# Altium PCB STM32F302VC_EVM.PcbDoc (part 10 of 19)
Units mil, origin at the board's own origin, x right, y up, seen from the top; angles counter-clockwise.
Board outline 3937.01 x 3937.01 mil, 2 copper layers (Top Layer, Bottom Layer); 117 components, 166 nets, 602 pads, 373 vias.
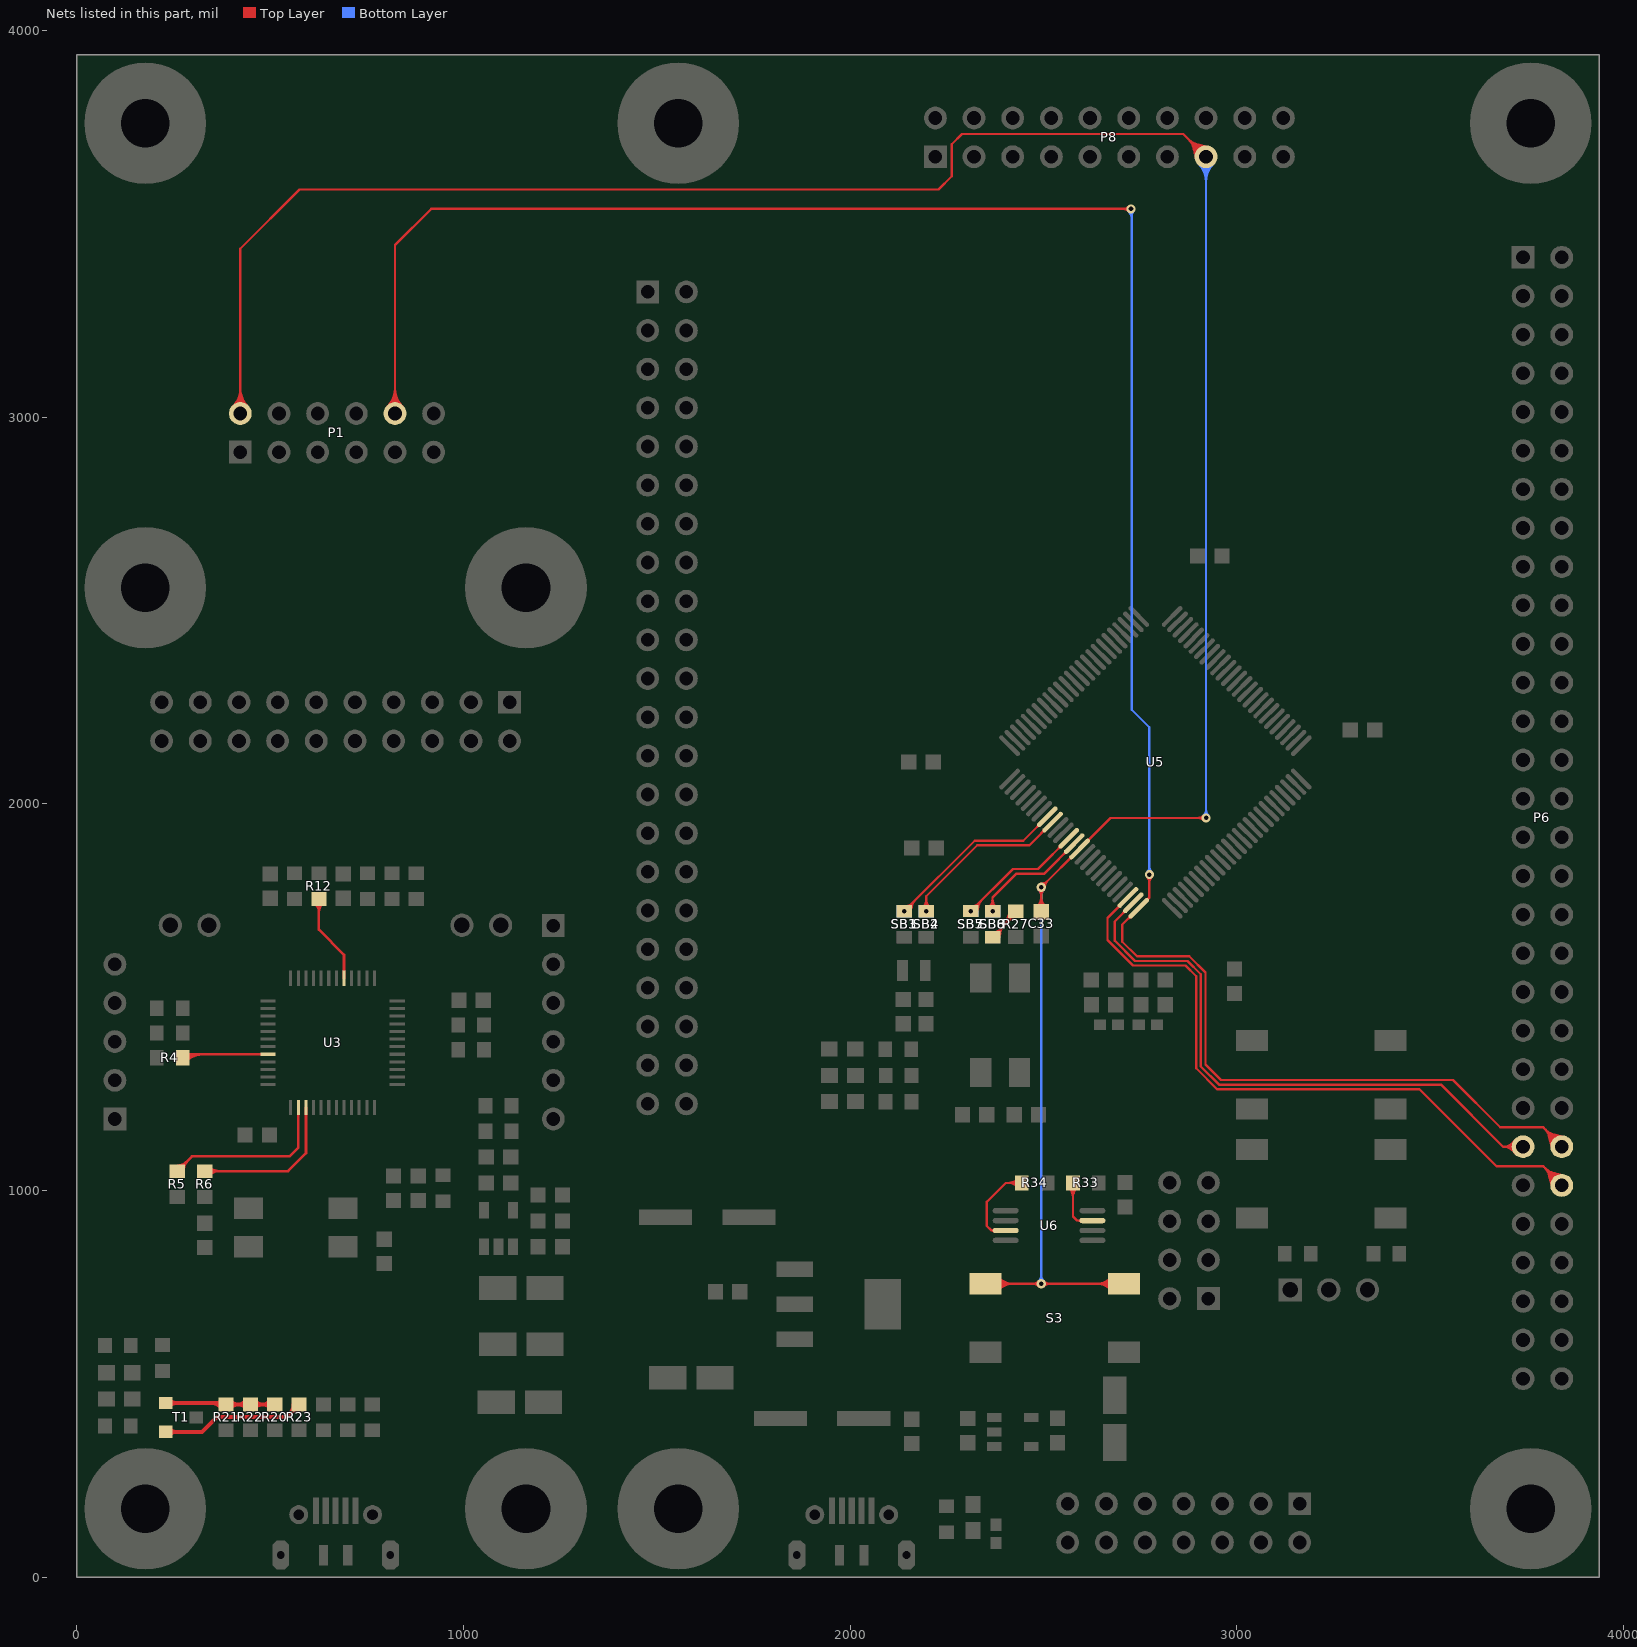
[diagram p10: the nets of this part, all layers, seen from the top]

## Via types
v1: diameter 23.62, hole 11.81, Top Layer to Bottom Layer, tented both sides, 372 vias
v2: diameter 50, hole 28, Top Layer to Bottom Layer, tented both sides, 1 vias

## Nets (pads, with @x,y where several pads share a name; then routed paths per layer and width w, separated by ;. In a path a pad name is that pad's centre, name@x,y a point inside that pad or via, vN(x,y) a via of type N, cw(c..) or ccw(c..) an arc to the next point about the centre after c; other vN are vias at no path point) (continued)
NetR4_2: R4.2 U3.44 | length 563.8
  Top Layer w7: R4.2@273.62,1343.5 282.48,1352.36 U3.44@494.09,1352.36 ; R4.2@273.78,1345.32 cw(c290.78,1328.32) R4.2@290.78,1352.36 ; R4.2@273.78,1345.32 cw(c290.78,1328.32) R4.2@290.78,1352.36 ; R4.2@273.78,1345.32 cw(c290.78,1328.32) R4.2@290.78,1352.36 ; R4.2@278.72,1340.37 cw(c307.68,1311.42) 307.68,1352.36 ; R4.2@278.72,1340.37 cw(c307.68,1311.42) 307.68,1352.36 ; R4.2@278.72,1340.37 cw(c307.68,1311.42) 307.68,1352.36 ; R4.2@283.67,1335.42 cw(c324.58,1294.52) 324.58,1352.36 ; R4.2@283.67,1335.42 cw(c324.58,1294.52) 324.58,1352.36 ; R4.2@283.67,1335.42 cw(c324.58,1294.52) 324.58,1352.36 ; R4.2@283.67,1355.52 ccw(c291.31,1363.16) R4.2@291.31,1352.36 ; R4.2@283.67,1355.52 ccw(c291.31,1363.16) R4.2@291.31,1352.36 ; R4.2@283.67,1355.52 ccw(c291.31,1363.16) R4.2@291.31,1352.36 ; R4.2@287.35,1341.79 cw(c297.52,1339.07) 292.26,1348.18 ; R4.2@287.35,1341.79 cw(c297.52,1339.07) 292.26,1348.18 ; R4.2@287.35,1341.79 cw(c297.52,1339.07) 292.26,1348.18
NetR5_2: R5.2 U3.2 | length 735.8
  Top Layer w7: R5.2@259.84,1050.2 298.1,1088.46 550.07,1088.46 572.83,1111.22 U3.2@572.83,1214.57 ; R5.2@261.81,1064.41 ccw(c261.81,1093.98) 282.72,1073.07 ; R5.2@261.81,1064.41 ccw(c261.81,1093.98) 282.72,1073.07 ; R5.2@261.81,1064.41 ccw(c261.81,1093.98) 282.72,1073.07 ; R5.2@262.03,1050.16 cw(c284.85,1046.68) 278.87,1068.99 ; R5.2@262.03,1050.16 cw(c284.85,1046.68) 278.87,1068.99 ; R5.2@262.03,1050.16 cw(c284.85,1046.68) 278.87,1068.99 ; R5.2@269.03,1050.2 cw(c291.2,1050.2) R5.2@275.52,1065.88 ; R5.2@269.03,1050.2 cw(c291.2,1050.2) R5.2@275.52,1065.88 ; R5.2@269.03,1050.2 cw(c291.2,1050.2) R5.2@275.52,1065.88 ; R5.2@276.03,1050.2 cw(c315.1,1050.2) 287.47,1077.83 ; R5.2@276.03,1050.2 cw(c315.1,1050.2) 287.47,1077.83 ; R5.2@276.03,1050.2 cw(c315.1,1050.2) 287.47,1077.83
NetR6_2: R6.2 U3.3 | length 560.7
  Top Layer w7: R6.2@330.71,1050.2 546.1,1050.2 592.52,1096.62 U3.3@592.52,1214.57 ; R6.2@342.73,1040.14 cw(c367,1015.88) 367,1050.2 ; R6.2@342.73,1040.14 cw(c367,1015.88) 367,1050.2 ; R6.2@342.73,1040.14 cw(c367,1015.88) 367,1050.2 ; R6.2@342.73,1060.25 ccw(c367,1084.52) 367,1050.2 ; R6.2@342.73,1060.25 ccw(c367,1084.52) 367,1050.2 ; R6.2@342.73,1060.25 ccw(c367,1084.52) 367,1050.2
NetR12_1: R12.1 U3.29 | length 393.4
  Top Layer w7: R12.1@625.98,1753.94 625.98,1674.58 690.94,1609.62 U3.29@690.94,1549.21 ; R12.1@615.93,1743.88 cw(c591.66,1719.62) 625.98,1719.62 ; R12.1@615.93,1743.88 cw(c591.66,1719.62) 625.98,1719.62 ; R12.1@615.93,1743.88 cw(c591.66,1719.62) 625.98,1719.62 ; 625.98,1719.62 cw(c660.31,1719.62) R12.1@636.04,1743.88 ; 625.98,1719.62 cw(c660.31,1719.62) R12.1@636.04,1743.88 ; 625.98,1719.62 cw(c660.31,1719.62) R12.1@636.04,1743.88
NetR20_1: R20.1 R21.1 R22.2 T1.1 | length 1128.8
  Top Layer w10: T1.1@230.31,450.79 381.89,450.79 R21.1@385.83,446.85 R22.2@448.82,446.85 R20.1@511.81,446.85 ; T1.1@239.88,443.19 cw(c258.23,424.84) 258.23,450.79 ; T1.1@239.88,443.19 cw(c258.23,424.84) 258.23,450.79 ; T1.1@239.88,443.19 cw(c258.23,424.84) 258.23,450.79 ; T1.1@239.88,458.39 ccw(c258.23,476.74) 258.23,450.79 ; T1.1@239.88,458.39 ccw(c258.23,476.74) 258.23,450.79 ; T1.1@239.88,458.39 ccw(c258.23,476.74) 258.23,450.79 ; 343.65,450.79 cw(c343.65,406.64) R21.1@374.87,437.86 ; 343.65,450.79 cw(c343.65,406.64) R21.1@374.87,437.86 ; 343.65,450.79 cw(c343.65,406.64) R21.1@374.87,437.86 ; 362.66,450.79 ccw(c362.66,468.05) R21.1@374.87,455.84 ; 362.66,450.79 ccw(c362.66,468.05) R21.1@374.87,455.84 ; 362.66,450.79 ccw(c362.66,468.05) R21.1@374.87,455.84 ; R21.1@396.79,437.86 cw(c418.5,416.15) 418.5,446.85 ; R21.1@396.79,437.86 cw(c418.5,416.15) 418.5,446.85 ; R21.1@396.79,437.86 cw(c418.5,416.15) 418.5,446.85 ; R21.1@396.79,455.84 ccw(c418.5,477.55) 418.5,446.85 ; R21.1@396.79,455.84 ccw(c418.5,477.55) 418.5,446.85 ; R21.1@396.79,455.84 ccw(c418.5,477.55) 418.5,446.85 ; 416.15,446.85 cw(c416.15,416.15) R22.2@437.86,437.86 ; 416.15,446.85 ccw(c416.15,477.55) R22.2@437.86,455.84 ; 416.15,446.85 ccw(c416.15,477.55) R22.2@437.86,455.84 ; 416.15,446.85 cw(c416.15,416.15) R22.2@437.86,437.86 ; 416.15,446.85 ccw(c416.15,477.55) R22.2@437.86,455.84 ; 416.15,446.85 cw(c416.15,416.15) R22.2@437.86,437.86 ; R22.2@459.78,437.86 cw(c481.49,416.15) 481.49,446.85 ; R22.2@459.78,437.86 cw(c481.49,416.15) 481.49,446.85 ; R22.2@459.78,437.86 cw(c481.49,416.15) 481.49,446.85 ; R22.2@459.78,455.84 ccw(c481.49,477.55) 481.49,446.85 ; R22.2@459.78,455.84 ccw(c481.49,477.55) 481.49,446.85 ; R22.2@459.78,455.84 ccw(c481.49,477.55) 481.49,446.85 ; 479.14,446.85 cw(c479.14,416.15) R20.1@500.85,437.86 ; 479.14,446.85 ccw(c479.14,477.55) R20.1@500.85,455.84 ; 479.14,446.85 ccw(c479.14,477.55) R20.1@500.85,455.84 ; 479.14,446.85 cw(c479.14,416.15) R20.1@500.85,437.86 ; 479.14,446.85 ccw(c479.14,477.55) R20.1@500.85,455.84 ; 479.14,446.85 cw(c479.14,416.15) R20.1@500.85,437.86
NetR23_2: R23.2 T1.2 | length 725.9
  Top Layer w10: T1.2@230.31,375.98 323.82,375.98 362.2,414.37 542.32,414.37 R23.2@574.8,446.85 ; T1.2@239.88,368.38 cw(c258.23,350.04) 258.23,375.98 ; T1.2@239.88,368.38 cw(c258.23,350.04) 258.23,375.98 ; T1.2@239.88,368.38 cw(c258.23,350.04) 258.23,375.98 ; T1.2@239.88,383.58 ccw(c258.23,401.93) 258.23,375.98 ; T1.2@239.88,383.58 ccw(c258.23,401.93) 258.23,375.98 ; T1.2@239.88,383.58 ccw(c258.23,401.93) 258.23,375.98 ; 549.73,421.78 ccw(c524.67,446.85) R23.2@560.12,446.85 ; 549.73,421.78 ccw(c524.67,446.85) R23.2@560.12,446.85 ; 549.73,421.78 ccw(c524.67,446.85) R23.2@560.12,446.85 ; 554.31,425.16 cw(c580.27,418.2) R23.2@573.52,444.22 ; 554.31,425.16 cw(c580.27,418.2) R23.2@573.52,444.22 ; 554.31,425.16 cw(c580.27,418.2) R23.2@573.52,444.22 ; 554.49,426.53 cw(c572.83,408.19) R23.2@572.83,434.13 ; 554.49,426.53 cw(c572.83,408.19) R23.2@572.83,434.13 ; 554.49,426.53 cw(c572.83,408.19) R23.2@572.83,434.13
NetR27_2: R27.2 SB8.2 | length 1050.4
  Top Layer w6: SB8.2@2368.11,1654.88 2428.15,1714.92 R27.2@2428.15,1722.44 ; SB8.2@2371.81,1655.84 ccw(c2363.48,1682.65) 2390.6,1675.39 ; SB8.2@2371.81,1655.84 ccw(c2363.48,1682.65) 2390.6,1675.39 ; SB8.2@2371.81,1655.84 ccw(c2363.48,1682.65) 2390.6,1675.39 ; SB8.2@2372.11,1667.88 ccw(c2372.11,1689.61) 2387.47,1674.25 ; SB8.2@2372.11,1667.88 ccw(c2372.11,1689.61) 2387.47,1674.25 ; SB8.2@2372.11,1667.88 ccw(c2372.11,1689.61) 2387.47,1674.25 ; SB8.2@2373.59,1650.11 ccw(c2367.3,1670.36) SB8.2@2387.79,1664.87 ; SB8.2@2373.59,1650.11 ccw(c2367.3,1670.36) SB8.2@2387.79,1664.87 ; SB8.2@2373.59,1650.11 ccw(c2367.3,1670.36) SB8.2@2387.79,1664.87 ; SB8.2@2379.11,1654.88 cw(c2405.67,1654.88) 2386.89,1673.66 ; SB8.2@2379.11,1654.88 cw(c2405.67,1654.88) 2386.89,1673.66 ; SB8.2@2379.11,1654.88 cw(c2405.67,1654.88) 2386.89,1673.66 ; SB8.2@2385.11,1654.88 cw(c2426.15,1654.88) 2397.13,1683.9 ; SB8.2@2385.11,1654.88 cw(c2426.15,1654.88) 2397.13,1683.9 ; SB8.2@2385.11,1654.88 cw(c2426.15,1654.88) 2397.13,1683.9 ; 2394.35,1681.12 ccw(c2353.03,1722.44) R27.2@2411.46,1722.44 ; 2394.35,1681.12 ccw(c2353.03,1722.44) R27.2@2411.46,1722.44 ; 2394.35,1681.12 ccw(c2353.03,1722.44) R27.2@2411.46,1722.44 ; 2403.56,1692.95 cw(c2442.75,1682.45) R27.2@2427.22,1719.93 ; 2403.56,1692.95 cw(c2442.75,1682.45) R27.2@2427.22,1719.93 ; 2403.56,1692.95 cw(c2442.75,1682.45) R27.2@2427.22,1719.93 ; 2404.59,1691.37 ccw(c2373.52,1722.44) R27.2@2417.46,1722.44 ; 2404.59,1691.37 ccw(c2373.52,1722.44) R27.2@2417.46,1722.44 ; 2404.59,1691.37 ccw(c2373.52,1722.44) R27.2@2417.46,1722.44 ; 2406.71,1704.71 cw(c2436.88,1696.62) R27.2@2424.92,1725.47 ; 2406.71,1704.71 cw(c2436.88,1696.62) R27.2@2424.92,1725.47 ; 2406.71,1704.71 cw(c2436.88,1696.62) R27.2@2424.92,1725.47 ; R27.2@2413.12,1706.22 cw(c2431.62,1701.26) R27.2@2426.86,1719.81 ; R27.2@2413.12,1706.22 cw(c2431.62,1701.26) R27.2@2426.86,1719.81 ; R27.2@2413.12,1706.22 cw(c2431.62,1701.26) R27.2@2426.86,1719.81 ; 2414.84,1701.61 ccw(c2394,1722.44) R27.2@2423.46,1722.44 ; 2414.84,1701.61 ccw(c2394,1722.44) R27.2@2423.46,1722.44 ; 2414.84,1701.61 ccw(c2394,1722.44) R27.2@2423.46,1722.44 ; 2417.25,1704.03 cw(c2426.18,1695.1) R27.2@2426.18,1707.72 ; 2417.25,1704.03 cw(c2426.18,1695.1) R27.2@2426.18,1707.72 ; 2417.25,1704.03 cw(c2426.18,1695.1) R27.2@2426.18,1707.72
NetR33_1: R33.1 U6.7 | length 452.5
  Top Layer w6: R33.1@2575.99,1019.68 2575.99,932.87 2586.61,922.24 U6.7@2626.46,922.24 ; R33.1@2565.58,1007.31 cw(c2540.46,982.19) 2575.99,982.19 ; R33.1@2565.58,1007.31 cw(c2540.46,982.19) 2575.99,982.19 ; R33.1@2565.58,1007.31 cw(c2540.46,982.19) 2575.99,982.19 ; R33.1@2569.82,1011.55 cw(c2554.94,996.67) 2575.99,996.67 ; R33.1@2569.82,1011.55 cw(c2554.94,996.67) 2575.99,996.67 ; R33.1@2569.82,1011.55 cw(c2554.94,996.67) 2575.99,996.67 ; 2575.99,982.19 cw(c2611.51,982.19) R33.1@2586.39,1007.31 ; 2575.99,982.19 cw(c2611.51,982.19) R33.1@2586.39,1007.31 ; 2575.99,982.19 cw(c2611.51,982.19) R33.1@2586.39,1007.31 ; 2575.99,996.67 cw(c2597.03,996.67) R33.1@2582.15,1011.55 ; 2575.99,996.67 cw(c2597.03,996.67) R33.1@2582.15,1011.55 ; 2575.99,996.67 cw(c2597.03,996.67) R33.1@2582.15,1011.55 ; 2590.49,922.24 cw(c2590.49,912.85) U6.7@2597.13,919.49 ; 2590.49,922.24 ccw(c2590.49,931.63) U6.7@2597.13,924.99 ; 2590.49,922.24 ccw(c2590.49,931.63) U6.7@2597.13,924.99 ; 2590.49,922.24 cw(c2590.49,912.85) U6.7@2597.13,919.49 ; 2590.49,922.24 ccw(c2590.49,931.63) U6.7@2597.13,924.99 ; 2590.49,922.24 cw(c2590.49,912.85) U6.7@2597.13,919.49
NetR34_2: R34.2 U6.3 | length 537.5
  Top Layer w6: U6.3@2402.05,896.65 2365.16,896.65 2353.35,908.46 2353.35,970.6 2402.43,1019.68 R34.2@2443.9,1019.68 ; 2366.08,896.65 cw(c2366.08,887.26) U6.3@2372.72,893.9 ; 2366.08,896.65 ccw(c2366.08,906.04) U6.3@2372.72,899.4 ; 2366.08,896.65 ccw(c2366.08,906.04) U6.3@2372.72,899.4 ; 2366.08,896.65 cw(c2366.08,887.26) U6.3@2372.72,893.9 ; 2366.08,896.65 ccw(c2366.08,906.04) U6.3@2372.72,899.4 ; 2366.08,896.65 cw(c2366.08,887.26) U6.3@2372.72,893.9 ; 2408.37,1019.68 cw(c2408.37,984.16) R34.2@2433.49,1009.28 ; 2408.37,1019.68 ccw(c2408.37,1055.21) R34.2@2433.49,1030.09 ; 2408.37,1019.68 ccw(c2408.37,1055.21) R34.2@2433.49,1030.09 ; 2408.37,1019.68 cw(c2408.37,984.16) R34.2@2433.49,1009.28 ; 2408.37,1019.68 ccw(c2408.37,1055.21) R34.2@2433.49,1030.09 ; 2408.37,1019.68 cw(c2408.37,984.16) R34.2@2433.49,1009.28 ; 2422.85,1019.69 cw(c2422.85,998.64) R34.2@2437.73,1013.52 ; 2422.85,1019.68 ccw(c2422.85,1040.73) R34.2@2437.73,1025.85 ; 2422.85,1019.68 ccw(c2422.85,1040.73) R34.2@2437.73,1025.85 ; 2422.85,1019.69 cw(c2422.85,998.64) R34.2@2437.73,1013.52 ; 2422.85,1019.68 ccw(c2422.85,1040.73) R34.2@2437.73,1025.85 ; 2422.85,1019.69 cw(c2422.85,998.64) R34.2@2437.73,1013.52
NetSB1_2: SB1.2 SB3.2 U5.8 | length 1262.7
  Top Layer w6: v1(2139.76,1722.59) 2321.89,1904.72 2447.61,1904.72 U5.8@2509.59,1966.7 ; SB3.2@2136.64,1723.23 cw(c2149.2,1720.66) SB3.2@2145.88,1733.04 ; SB3.2@2136.64,1723.23 cw(c2149.2,1720.66) SB3.2@2145.88,1733.04 ; SB3.2@2136.64,1723.23 cw(c2149.2,1720.66) SB3.2@2145.88,1733.04 ; SB3.2@2139.76,1731.4 ccw(c2139.76,1752.67) SB3.2@2154.8,1737.63 ; SB3.2@2139.76,1731.4 ccw(c2139.76,1752.67) SB3.2@2154.8,1737.63 ; SB3.2@2139.76,1731.4 ccw(c2139.76,1752.67) SB3.2@2154.8,1737.63 ; SB3.2@2140.4,1719.46 ccw(c2137.83,1732.02) SB3.2@2150.21,1728.7 ; SB3.2@2140.4,1719.46 ccw(c2137.83,1732.02) SB3.2@2150.21,1728.7 ; SB3.2@2140.4,1719.46 ccw(c2137.83,1732.02) SB3.2@2150.21,1728.7 ; SB3.2@2140.69,1719.54 ccw(c2135.18,1737.68) SB3.2@2153.49,1732.77 ; SB3.2@2140.69,1719.54 ccw(c2135.18,1737.68) SB3.2@2153.49,1732.77 ; SB3.2@2140.69,1719.54 ccw(c2135.18,1737.68) SB3.2@2153.49,1732.77 ; SB3.2@2140.69,1719.54 ccw(c2135.18,1737.68) SB3.2@2153.49,1732.77 ; SB3.2@2140.69,1719.54 ccw(c2135.18,1737.68) SB3.2@2153.49,1732.77 ; SB3.2@2140.69,1719.54 ccw(c2135.18,1737.68) SB3.2@2153.49,1732.77 ; SB3.2@2143.47,1723.54 ccw(c2135.13,1750.36) 2162.26,1743.09 ; SB3.2@2143.47,1723.54 ccw(c2135.13,1750.36) 2162.26,1743.09 ; SB3.2@2143.47,1723.54 ccw(c2135.13,1750.36) 2162.26,1743.09 ; SB3.2@2143.74,1730.45 ccw(c2149.02,1740.92) SB3.2@2155.29,1731 ; SB3.2@2143.74,1730.45 ccw(c2149.02,1740.92) SB3.2@2155.29,1731 ; SB3.2@2143.74,1730.45 ccw(c2149.02,1740.92) SB3.2@2155.29,1731 ; SB3.2@2143.74,1730.45 ccw(c2149.02,1740.92) SB3.2@2155.29,1731 ; SB3.2@2143.76,1735.59 ccw(c2143.76,1757.32) 2159.13,1741.95 ; SB3.2@2143.76,1735.59 ccw(c2143.76,1757.32) 2159.13,1741.95 ; SB3.2@2143.76,1735.59 ccw(c2143.76,1757.32) 2159.13,1741.95 ; SB3.2@2145.25,1717.81 ccw(c2138.95,1738.07) SB3.2@2159.44,1732.58 ; SB3.2@2145.25,1717.81 ccw(c2138.95,1738.07) SB3.2@2159.44,1732.58 ; SB3.2@2145.25,1717.81 ccw(c2138.95,1738.07) SB3.2@2159.44,1732.58 ; SB3.2@2148.42,1720.93 cw(c2163.46,1718.05) SB3.2@2155.29,1731 ; SB3.2@2148.42,1720.93 cw(c2163.46,1718.05) SB3.2@2155.29,1731 ; SB3.2@2148.42,1720.93 cw(c2163.46,1718.05) SB3.2@2155.29,1731 ; SB3.2@2148.42,1720.93 cw(c2163.46,1718.05) SB3.2@2155.29,1731 ; SB3.2@2148.57,1722.59 cw(c2169.85,1722.59) SB3.2@2154.8,1737.63 ; SB3.2@2148.57,1722.59 cw(c2169.85,1722.59) SB3.2@2154.8,1737.63 ; SB3.2@2148.57,1722.59 cw(c2169.85,1722.59) SB3.2@2154.8,1737.63 ; SB3.2@2150.76,1722.59 cw(c2177.32,1722.59) 2158.54,1741.37 ; SB3.2@2150.76,1722.59 cw(c2177.32,1722.59) 2158.54,1741.37 ; SB3.2@2150.76,1722.59 cw(c2177.32,1722.59) 2158.54,1741.37 ; SB3.2@2156.76,1722.59 cw(c2197.81,1722.59) 2168.78,1751.61 ; SB3.2@2156.76,1722.59 cw(c2197.81,1722.59) 2168.78,1751.61 ; SB3.2@2156.76,1722.59 cw(c2197.81,1722.59) 2168.78,1751.61 ; 2483.75,1940.86 cw(c2488.71,1935.9) U5.8@2488.71,1942.91 ; 2483.75,1940.86 ccw(c2478.79,1945.82) U5.8@2485.81,1945.82 ; 2483.75,1940.86 ccw(c2478.79,1945.82) U5.8@2485.81,1945.82 ; 2483.75,1940.86 cw(c2488.71,1935.9) U5.8@2488.71,1942.91 ; 2483.75,1940.86 ccw(c2478.79,1945.82) U5.8@2485.81,1945.82 ; 2483.75,1940.86 cw(c2488.71,1935.9) U5.8@2488.71,1942.91
NetSB2_2: SB2.2 SB4.2 U5.9 | length 805.3
  Top Layer w6: v1(2196.85,1722.59) 2196.85,1761.02 2328.55,1892.72 2463.45,1892.72 U5.9@2523.51,1952.78 ; SB4.2@2187.66,1731.78 ccw(c2165.47,1753.97) 2196.85,1753.97 ; SB4.2@2187.66,1731.78 ccw(c2165.47,1753.97) 2196.85,1753.97 ; SB4.2@2187.66,1731.78 ccw(c2165.47,1753.97) 2196.85,1753.97 ; SB4.2@2190.62,1728.82 ccw(c2175.58,1743.86) 2196.85,1743.86 ; SB4.2@2190.62,1728.82 ccw(c2175.58,1743.86) 2196.85,1743.86 ; SB4.2@2190.62,1728.82 ccw(c2175.58,1743.86) 2196.85,1743.86 ; SB4.2@2191.9,1727.54 ccw(c2179.95,1739.49) 2196.85,1739.49 ; SB4.2@2191.9,1727.54 ccw(c2179.95,1739.49) 2196.85,1739.49 ; SB4.2@2191.9,1727.54 ccw(c2179.95,1739.49) 2196.85,1739.49 ; 2196.85,1739.49 ccw(c2213.75,1739.49) SB4.2@2201.8,1727.54 ; 2196.85,1739.49 ccw(c2213.75,1739.49) SB4.2@2201.8,1727.54 ; 2196.85,1739.49 ccw(c2213.75,1739.49) SB4.2@2201.8,1727.54 ; 2196.85,1743.86 ccw(c2218.12,1743.86) SB4.2@2203.08,1728.82 ; 2196.85,1743.86 ccw(c2218.12,1743.86) SB4.2@2203.08,1728.82 ; 2196.85,1743.86 ccw(c2218.12,1743.86) SB4.2@2203.08,1728.82 ; 2196.85,1753.97 ccw(c2228.23,1753.97) SB4.2@2206.04,1731.78 ; 2196.85,1753.97 ccw(c2228.23,1753.97) SB4.2@2206.04,1731.78 ; 2196.85,1753.97 ccw(c2228.23,1753.97) SB4.2@2206.04,1731.78 ; 2497.67,1926.94 cw(c2502.63,1921.98) U5.9@2502.63,1928.99 ; 2497.67,1926.94 ccw(c2492.71,1931.9) U5.9@2499.72,1931.9 ; 2497.67,1926.94 ccw(c2492.71,1931.9) U5.9@2499.72,1931.9 ; 2497.67,1926.94 cw(c2502.63,1921.98) U5.9@2502.63,1928.99 ; 2497.67,1926.94 ccw(c2492.71,1931.9) U5.9@2499.72,1931.9 ; 2497.67,1926.94 cw(c2502.63,1921.98) U5.9@2502.63,1928.99
NetSB5_1: SB5.1 SB7.1 U5.12 | length 1123
  Top Layer w6: v1(2312.01,1722.73) 2420.97,1831.69 2485.94,1831.69 U5.12@2565.27,1911.02 ; SB7.1@2308.88,1723.37 cw(c2321.44,1720.79) SB7.1@2318.12,1733.18 ; SB7.1@2308.88,1723.37 cw(c2321.44,1720.79) SB7.1@2318.12,1733.18 ; SB7.1@2308.88,1723.37 cw(c2321.44,1720.79) SB7.1@2318.12,1733.18 ; SB7.1@2312.01,1731.54 ccw(c2312.01,1752.81) SB7.1@2327.05,1737.77 ; SB7.1@2312.01,1731.54 ccw(c2312.01,1752.81) SB7.1@2327.05,1737.77 ; SB7.1@2312.01,1731.54 ccw(c2312.01,1752.81) SB7.1@2327.05,1737.77 ; SB7.1@2312.65,1719.6 ccw(c2310.08,1732.16) SB7.1@2322.46,1728.84 ; SB7.1@2312.65,1719.6 ccw(c2310.08,1732.16) SB7.1@2322.46,1728.84 ; SB7.1@2312.65,1719.6 ccw(c2310.08,1732.16) SB7.1@2322.46,1728.84 ; SB7.1@2312.94,1719.68 ccw(c2307.42,1737.82) SB7.1@2325.74,1732.91 ; SB7.1@2312.94,1719.68 ccw(c2307.42,1737.82) SB7.1@2325.74,1732.91 ; SB7.1@2312.94,1719.68 ccw(c2307.42,1737.82) SB7.1@2325.74,1732.91 ; SB7.1@2312.94,1719.68 ccw(c2307.42,1737.82) SB7.1@2325.74,1732.91 ; SB7.1@2312.94,1719.68 ccw(c2307.42,1737.82) SB7.1@2325.74,1732.91 ; SB7.1@2312.94,1719.68 ccw(c2307.42,1737.82) SB7.1@2325.74,1732.91 ; SB7.1@2315.71,1723.68 ccw(c2307.38,1750.5) 2334.5,1743.23 ; SB7.1@2315.71,1723.68 ccw(c2307.38,1750.5) 2334.5,1743.23 ; SB7.1@2315.71,1723.68 ccw(c2307.38,1750.5) 2334.5,1743.23 ; SB7.1@2315.98,1730.59 ccw(c2321.27,1741.06) SB7.1@2327.53,1731.14 ; SB7.1@2315.98,1730.59 ccw(c2321.27,1741.06) SB7.1@2327.53,1731.14 ; SB7.1@2315.98,1730.59 ccw(c2321.27,1741.06) SB7.1@2327.53,1731.14 ; SB7.1@2315.98,1730.59 ccw(c2321.27,1741.06) SB7.1@2327.53,1731.14 ; SB7.1@2316.01,1735.73 ccw(c2316.01,1757.45) 2331.37,1742.09 ; SB7.1@2316.01,1735.73 ccw(c2316.01,1757.45) 2331.37,1742.09 ; SB7.1@2316.01,1735.73 ccw(c2316.01,1757.45) 2331.37,1742.09 ; SB7.1@2317.49,1717.95 ccw(c2311.2,1738.21) SB7.1@2331.68,1732.72 ; SB7.1@2317.49,1717.95 ccw(c2311.2,1738.21) SB7.1@2331.68,1732.72 ; SB7.1@2317.49,1717.95 ccw(c2311.2,1738.21) SB7.1@2331.68,1732.72 ; SB7.1@2320.66,1721.07 cw(c2335.71,1718.19) SB7.1@2327.53,1731.14 ; SB7.1@2320.66,1721.07 cw(c2335.71,1718.19) SB7.1@2327.53,1731.14 ; SB7.1@2320.66,1721.07 cw(c2335.71,1718.19) SB7.1@2327.53,1731.14 ; SB7.1@2320.66,1721.07 cw(c2335.71,1718.19) SB7.1@2327.53,1731.14 ; SB7.1@2320.82,1722.73 cw(c2342.09,1722.73) SB7.1@2327.05,1737.77 ; SB7.1@2320.82,1722.73 cw(c2342.09,1722.73) SB7.1@2327.05,1737.77 ; SB7.1@2320.82,1722.73 cw(c2342.09,1722.73) SB7.1@2327.05,1737.77 ; SB7.1@2323.01,1722.73 cw(c2349.56,1722.73) 2330.79,1741.5 ; SB7.1@2323.01,1722.73 cw(c2349.56,1722.73) 2330.79,1741.5 ; SB7.1@2323.01,1722.73 cw(c2349.56,1722.73) 2330.79,1741.5 ; SB7.1@2329.01,1722.73 cw(c2370.05,1722.73) 2341.03,1751.75 ; SB7.1@2329.01,1722.73 cw(c2370.05,1722.73) 2341.03,1751.75 ; SB7.1@2329.01,1722.73 cw(c2370.05,1722.73) 2341.03,1751.75 ; 2539.43,1885.18 cw(c2544.39,1880.22) U5.12@2544.39,1887.23 ; 2539.43,1885.18 ccw(c2534.47,1890.14) U5.12@2541.48,1890.14 ; 2539.43,1885.18 ccw(c2534.47,1890.14) U5.12@2541.48,1890.14 ; 2539.43,1885.18 cw(c2544.39,1880.22) U5.12@2544.39,1887.23 ; 2539.43,1885.18 ccw(c2534.47,1890.14) U5.12@2541.48,1890.14 ; 2539.43,1885.18 cw(c2544.39,1880.22) U5.12@2544.39,1887.23
NetSB6_1: SB6.1 SB8.1 U5.13 | length 665.1
  Top Layer w6: v1(2368.11,1722.38) 2368.11,1757.87 2429.13,1818.9 2500.98,1818.9 U5.13@2579.19,1897.1 ; SB8.1@2358.92,1731.58 ccw(c2336.73,1753.77) 2368.11,1753.77 ; SB8.1@2358.92,1731.58 ccw(c2336.73,1753.77) 2368.11,1753.77 ; SB8.1@2358.92,1731.58 ccw(c2336.73,1753.77) 2368.11,1753.77 ; SB8.1@2361.88,1728.61 ccw(c2346.84,1743.66) 2368.11,1743.66 ; SB8.1@2361.88,1728.61 ccw(c2346.84,1743.66) 2368.11,1743.66 ; SB8.1@2361.88,1728.61 ccw(c2346.84,1743.66) 2368.11,1743.66 ; SB8.1@2363.16,1727.33 ccw(c2351.21,1739.28) 2368.11,1739.28 ; SB8.1@2363.16,1727.33 ccw(c2351.21,1739.28) 2368.11,1739.28 ; SB8.1@2363.16,1727.33 ccw(c2351.21,1739.28) 2368.11,1739.28 ; 2368.11,1739.28 ccw(c2385.01,1739.28) SB8.1@2373.06,1727.33 ; 2368.11,1739.28 ccw(c2385.01,1739.28) SB8.1@2373.06,1727.33 ; 2368.11,1739.28 ccw(c2385.01,1739.28) SB8.1@2373.06,1727.33 ; 2368.11,1743.66 ccw(c2389.38,1743.66) SB8.1@2374.34,1728.61 ; 2368.11,1743.66 ccw(c2389.38,1743.66) SB8.1@2374.34,1728.61 ; 2368.11,1743.66 ccw(c2389.38,1743.66) SB8.1@2374.34,1728.61 ; 2368.11,1753.77 ccw(c2399.49,1753.77) SB8.1@2377.3,1731.58 ; 2368.11,1753.77 ccw(c2399.49,1753.77) SB8.1@2377.3,1731.58 ; 2368.11,1753.77 ccw(c2399.49,1753.77) SB8.1@2377.3,1731.58 ; 2553.35,1871.26 cw(c2558.31,1866.3) U5.13@2558.31,1873.32 ; 2553.35,1871.26 ccw(c2548.39,1876.22) U5.13@2555.4,1876.22 ; 2553.35,1871.26 ccw(c2548.39,1876.22) U5.13@2555.4,1876.22 ; 2553.35,1871.26 cw(c2558.31,1866.3) U5.13@2558.31,1873.32 ; 2553.35,1871.26 ccw(c2548.39,1876.22) U5.13@2555.4,1876.22 ; 2553.35,1871.26 cw(c2558.31,1866.3) U5.13@2558.31,1873.32
NRST: C33.2 P1.2 P8.15 S3.3 S3.4 U5.14 | length 12615.8
  Top Layer w6: P1.2@422.83,3009.45 422.83,3435.63 575.98,3588.77 2228.54,3588.77 2262.8,3623.03 2262.8,3705.71 2289.37,3732.28 2861.42,3732.28 P8.15@2920.28,3673.43 ; S3.4@2350.39,758.86 S3.3@2708.66,758.86 ; C33.2@2494.09,1720.85 v1(2494.09,1784.17) U5.14@2593.11,1883.18 2673.51,1963.58 v1(2920.28,1963.58) ; P1.2@404.08,3028.21 ccw(c358.79,3073.49) 422.83,3073.49 ; P1.2@404.08,3028.21 ccw(c358.79,3073.49) 422.83,3073.49 ; P1.2@404.08,3028.21 ccw(c358.79,3073.49) 422.83,3073.49 ; P1.2@408.32,3023.96 ccw(c373.28,3059.01) 422.83,3059.01 ; P1.2@408.32,3023.96 ccw(c373.28,3059.01) 422.83,3059.01 ; P1.2@408.32,3023.96 ccw(c373.28,3059.01) 422.83,3059.01 ; P1.2@412.56,3019.72 ccw(c387.76,3044.52) 422.83,3044.52 ; P1.2@412.56,3019.72 ccw(c387.76,3044.52) 422.83,3044.52 ; P1.2@412.56,3019.72 ccw(c387.76,3044.52) 422.83,3044.52 ; 422.83,3044.52 ccw(c457.91,3044.52) P1.2@433.11,3019.72 ; 422.83,3044.52 ccw(c457.91,3044.52) P1.2@433.11,3019.72 ; 422.83,3044.52 ccw(c457.91,3044.52) P1.2@433.11,3019.72 ; 422.83,3059.01 ccw(c472.39,3059.01) P1.2@437.35,3023.96 ; 422.83,3059.01 ccw(c472.39,3059.01) P1.2@437.35,3023.96 ; 422.83,3059.01 ccw(c472.39,3059.01) P1.2@437.35,3023.96 ; 422.83,3073.49 ccw(c486.88,3073.49) P1.2@441.59,3028.21 ; 422.83,3073.49 ccw(c486.88,3073.49) P1.2@441.59,3028.21 ; 422.83,3073.49 ccw(c486.88,3073.49) P1.2@441.59,3028.21 ; S3.4@2373.05,749.98 cw(c2394.49,728.54) 2394.49,758.86 ; S3.4@2373.05,749.98 cw(c2394.49,728.54) 2394.49,758.86 ; S3.4@2373.05,749.98 cw(c2394.49,728.54) 2394.49,758.86 ; S3.4@2373.05,767.74 ccw(c2394.49,789.18) 2394.49,758.86 ; S3.4@2373.05,767.74 ccw(c2394.49,789.18) 2394.49,758.86 ; S3.4@2373.05,767.74 ccw(c2394.49,789.18) 2394.49,758.86 ; S3.4@2377.3,745.74 cw(c2408.98,714.05) 2408.98,758.86 ; S3.4@2377.3,745.74 cw(c2408.98,714.05) 2408.98,758.86 ; S3.4@2377.3,745.74 cw(c2408.98,714.05) 2408.98,758.86 ; S3.4@2377.3,771.98 ccw(c2408.98,803.66) 2408.98,758.86 ; S3.4@2377.3,771.98 ccw(c2408.98,803.66) 2408.98,758.86 ; S3.4@2377.3,771.98 ccw(c2408.98,803.66) 2408.98,758.86 ; S3.4@2381.54,741.49 cw(c2423.46,699.57) 2423.46,758.86 ; S3.4@2381.54,741.49 cw(c2423.46,699.57) 2423.46,758.86 ; S3.4@2381.54,741.49 cw(c2423.46,699.57) 2423.46,758.86 ; S3.4@2381.54,776.22 ccw(c2423.46,818.15) 2423.46,758.86 ; S3.4@2381.54,776.22 ccw(c2423.46,818.15) 2423.46,758.86 ; S3.4@2381.54,776.22 ccw(c2423.46,818.15) 2423.46,758.86 ; 2472.82,758.86 cw(c2472.82,737.59) v1@2487.86,752.63 ; 2472.82,758.86 ccw(c2472.82,780.13) v1@2487.86,765.09 ; 2472.82,758.86 ccw(c2472.82,780.13) v1@2487.86,765.09 ; 2472.82,758.86 cw(c2472.82,737.59) v1@2487.86,752.63 ; 2472.82,758.86 ccw(c2472.82,780.13) v1@2487.86,765.09 ; 2472.82,758.86 cw(c2472.82,737.59) v1@2487.86,752.63 ; C33.2@2482.3,1732.65 ccw(c2453.81,1761.13) 2494.09,1761.13 ; C33.2@2482.3,1732.65 ccw(c2453.81,1761.13) 2494.09,1761.13 ; C33.2@2482.3,1732.65 ccw(c2453.81,1761.13) 2494.09,1761.13 ; C33.2@2486.54,1728.41 ccw(c2468.3,1746.65) 2494.09,1746.65 ; C33.2@2486.54,1728.41 ccw(c2468.3,1746.65) 2494.09,1746.65 ; C33.2@2486.54,1728.41 ccw(c2468.3,1746.65) 2494.09,1746.65 ; v1@2487.86,1777.94 cw(c2472.82,1762.9) 2494.09,1762.9 ; v1@2487.86,1777.94 cw(c2472.82,1762.9) 2494.09,1762.9 ; v1@2487.86,1777.94 cw(c2472.82,1762.9) 2494.09,1762.9 ; v1@2490.97,1784.81 cw(c2503.53,1782.24) 2500.21,1794.62 ; v1@2490.97,1784.81 cw(c2503.53,1782.24) 2500.21,1794.62 ; v1@2490.97,1784.81 cw(c2503.53,1782.24) 2500.21,1794.62 ; 2494.09,1746.65 ccw(c2519.89,1746.65) C33.2@2501.65,1728.41 ; 2494.09,1746.65 ccw(c2519.89,1746.65) C33.2@2501.65,1728.41 ; 2494.09,1746.65 ccw(c2519.89,1746.65) C33.2@2501.65,1728.41 ; 2494.09,1761.13 ccw(c2534.38,1761.13) C33.2@2505.89,1732.65 ; 2494.09,1761.13 ccw(c2534.38,1761.13) C33.2@2505.89,1732.65 ; 2494.09,1761.13 ccw(c2534.38,1761.13) C33.2@2505.89,1732.65 ; 2494.09,1762.9 cw(c2515.37,1762.9) v1@2500.32,1777.94 ; 2494.09,1762.9 cw(c2515.37,1762.9) v1@2500.32,1777.94 ; 2494.09,1762.9 cw(c2515.37,1762.9) v1@2500.32,1777.94 ; v1@2494.09,1792.98 ccw(c2494.09,1814.25) 2509.14,1799.21 ; v1@2494.09,1792.98 ccw(c2494.09,1814.25) 2509.14,1799.21 ; v1@2494.09,1792.98 ccw(c2494.09,1814.25) 2509.14,1799.21 ; v1@2494.73,1781.04 ccw(c2492.16,1793.6) 2504.54,1790.28 ; v1@2494.73,1781.04 ccw(c2492.16,1793.6) 2504.54,1790.28 ; v1@2494.73,1781.04 ccw(c2492.16,1793.6) 2504.54,1790.28 ; v1@2500.32,752.63 cw(c2515.37,737.59) 2515.37,758.86 ; v1@2500.32,752.63 cw(c2515.37,737.59) 2515.37,758.86 ; v1@2500.32,752.63 cw(c2515.37,737.59) 2515.37,758.86 ; v1@2500.32,765.09 ccw(c2515.37,780.13) 2515.37,758.86 ; v1@2500.32,765.09 ccw(c2515.37,780.13) 2515.37,758.86 ; v1@2500.32,765.09 ccw(c2515.37,780.13) 2515.37,758.86 ; v1@2502.91,1784.17 cw(c2524.18,1784.17) 2509.14,1799.21 ; v1@2502.91,1784.17 cw(c2524.18,1784.17) 2509.14,1799.21 ; v1@2502.91,1784.17 cw(c2524.18,1784.17) 2509.14,1799.21 ; 2567.27,1857.34 cw(c2572.23,1852.38) U5.14@2572.23,1859.4 ; 2567.27,1857.34 ccw(c2562.31,1862.3) U5.14@2569.32,1862.3 ; 2567.27,1857.34 ccw(c2562.31,1862.3) U5.14@2569.32,1862.3 ; 2567.27,1857.34 cw(c2572.23,1852.38) U5.14@2572.23,1859.4 ; 2567.27,1857.34 ccw(c2562.31,1862.3) U5.14@2569.32,1862.3 ; 2567.27,1857.34 cw(c2572.23,1852.38) U5.14@2572.23,1859.4 ; U5.14@2613.99,1906.97 ccw(c2613.99,1913.98) 2618.95,1909.02 ; U5.14@2613.99,1906.97 ccw(c2613.99,1913.98) 2618.95,1909.02 ; U5.14@2613.99,1906.97 ccw(c2613.99,1913.98) 2618.95,1909.02 ; U5.14@2616.89,1904.06 cw(c2623.91,1904.06) 2618.95,1909.02 ; U5.14@2616.89,1904.06 cw(c2623.91,1904.06) 2618.95,1909.02 ; U5.14@2616.89,1904.06 cw(c2623.91,1904.06) 2618.95,1909.02 ; 2635.59,758.86 cw(c2635.59,699.57) S3.3@2677.52,741.49 ; 2635.59,758.86 ccw(c2635.59,818.15) S3.3@2677.52,776.22 ; 2635.59,758.86 ccw(c2635.59,818.15) S3.3@2677.52,776.22 ; 2635.59,758.86 cw(c2635.59,699.57) S3.3@2677.52,741.49 ; 2635.59,758.86 ccw(c2635.59,818.15) S3.3@2677.52,776.22 ; 2635.59,758.86 cw(c2635.59,699.57) S3.3@2677.52,741.49 ; 2650.08,758.86 cw(c2650.08,714.05) S3.3@2681.76,745.74 ; 2650.08,758.86 ccw(c2650.08,803.66) S3.3@2681.76,771.98 ; 2650.08,758.86 ccw(c2650.08,803.66) S3.3@2681.76,771.98 ; 2650.08,758.86 cw(c2650.08,714.05) S3.3@2681.76,745.74 ; 2650.08,758.86 ccw(c2650.08,803.66) S3.3@2681.76,771.98 ; 2650.08,758.86 cw(c2650.08,714.05) S3.3@2681.76,745.74 ; 2664.56,758.86 cw(c2664.56,728.54) S3.3@2686,749.98 ; 2664.56,758.86 ccw(c2664.56,789.18) S3.3@2686,767.74 ; 2664.56,758.86 ccw(c2664.56,789.18) S3.3@2686,767.74 ; 2664.56,758.86 cw(c2664.56,728.54) S3.3@2686,749.98 ; 2664.56,758.86 ccw(c2664.56,789.18) S3.3@2686,767.74 ; 2664.56,758.86 cw(c2664.56,728.54) S3.3@2686,749.98 ; 2874.99,3718.71 cw(c2829.7,3673.43) P8.15@2893.75,3673.43 ; 2874.99,3718.71 ccw(c2920.28,3764) P8.15@2920.28,3699.95 ; 2874.99,3718.71 ccw(c2920.28,3764) P8.15@2920.28,3699.95 ; 2874.99,3718.71 cw(c2829.7,3673.43) P8.15@2893.75,3673.43 ; 2874.99,3718.71 ccw(c2920.28,3764) P8.15@2920.28,3699.95 ; 2874.99,3718.71 cw(c2829.7,3673.43) P8.15@2893.75,3673.43 ; 2885.23,3708.47 cw(c2850.19,3673.43) P8.15@2899.75,3673.43 ; 2885.23,3708.47 ccw(c2920.28,3743.51) P8.15@2920.28,3693.95 ; 2885.23,3708.47 ccw(c2920.28,3743.51) P8.15@2920.28,3693.95 ; 2885.23,3708.47 cw(c2850.19,3673.43) P8.15@2899.75,3673.43 ; 2885.23,3708.47 ccw(c2920.28,3743.51) P8.15@2920.28,3693.95 ; 2885.23,3708.47 cw(c2850.19,3673.43) P8.15@2899.75,3673.43 ; 2886.25,3701.42 ccw(c2928.32,3712.69) P8.15@2919.58,3670.02 ; 2886.25,3701.42 ccw(c2928.32,3712.69) P8.15@2919.58,3670.02 ; 2886.25,3701.42 ccw(c2928.32,3712.69) P8.15@2919.58,3670.02 ; 2888.76,3692.04 ccw(c2926.14,3702.06) P8.15@2918.38,3664.15 ; 2888.76,3692.04 ccw(c2926.14,3702.06) P8.15@2918.38,3664.15 ; 2888.76,3692.04 ccw(c2926.14,3702.06) P8.15@2918.38,3664.15 ; 2891.27,3682.66 ccw(c2923.96,3691.42) P8.15@2917.17,3658.27 ; 2891.27,3682.66 ccw(c2923.96,3691.42) P8.15@2917.17,3658.27 ; 2891.27,3682.66 ccw(c2923.96,3691.42) P8.15@2917.17,3658.27 ; 2892.28,3707.45 cw(c2881.01,3665.38) P8.15@2923.68,3674.12 ; 2892.28,3707.45 cw(c2881.01,3665.38) P8.15@2923.68,3674.12 ; 2892.28,3707.45 cw(c2881.01,3665.38) P8.15@2923.68,3674.12 ; 2892.97,3698.72 ccw(c2922.76,3706.7) P8.15@2920.46,3675.95 ; 2892.97,3698.72 ccw(c2922.76,3706.7) P8.15@2920.46,3675.95 ; 2892.97,3698.72 ccw(c2922.76,3706.7) P8.15@2920.46,3675.95 ; 2894.99,3700.73 cw(c2887,3670.94) P8.15@2917.76,3673.24 ; 2894.99,3700.73 cw(c2887,3670.94) P8.15@2917.76,3673.24 ; 2894.99,3700.73 cw(c2887,3670.94) P8.15@2917.76,3673.24 ; 2895.16,3690.55 ccw(c2922.09,3697.77) P8.15@2920.02,3669.96 ; 2895.16,3690.55 ccw(c2922.09,3697.77) P8.15@2920.02,3669.96 ; 2895.16,3690.55 ccw(c2922.09,3697.77) P8.15@2920.02,3669.96 ; 2895.48,3698.23 cw(c2870.68,3673.43) P8.15@2905.75,3673.43 ; 2895.48,3698.23 ccw(c2920.28,3723.03) P8.15@2920.28,3687.95 ; 2895.48,3698.23 ccw(c2920.28,3723.03) P8.15@2920.28,3687.95 ; 2895.48,3698.23 cw(c2870.68,3673.43) P8.15@2905.75,3673.43 ; 2895.48,3698.23 ccw(c2920.28,3723.03) P8.15@2920.28,3687.95 ; 2895.48,3698.23 cw(c2870.68,3673.43) P8.15@2905.75,3673.43 ; 2899,1963.58 cw(c2899,1942.31) v1@2914.05,1957.35 ; 2899,1963.58 ccw(c2899,1984.85) v1@2914.05,1969.81 ; 2899,1963.58 ccw(c2899,1984.85) v1@2914.05,1969.81 ; 2899,1963.58 cw(c2899,1942.31) v1@2914.05,1957.35 ; 2899,1963.58 ccw(c2899,1984.85) v1@2914.05,1969.81 ; 2899,1963.58 cw(c2899,1942.31) v1@2914.05,1957.35 ; 2901.66,3704.94 cw(c2891.65,3667.56) P8.15@2929.56,3675.33 ; 2901.66,3704.94 cw(c2891.65,3667.56) P8.15@2929.56,3675.33 ; 2901.66,3704.94 cw(c2891.65,3667.56) P8.15@2929.56,3675.33 ; 2903.15,3698.54 cw(c2895.93,3671.61) P8.15@2923.74,3673.68 ; 2903.15,3698.54 cw(c2895.93,3671.61) P8.15@2923.74,3673.68 ; 2903.15,3698.54 cw(c2895.93,3671.61) P8.15@2923.74,3673.68 ; 2911.04,3702.43 cw(c2902.28,3669.74) P8.15@2935.43,3676.53 ; 2911.04,3702.43 cw(c2902.28,3669.74) P8.15@2935.43,3676.53 ; 2911.04,3702.43 cw(c2902.28,3669.74) P8.15@2935.43,3676.53
  Bottom Layer w6: v1(2494.09,758.86) v1(2494.09,1784.17) ; v1(2920.28,1963.58) P8.15@2920.28,3673.43 ; v1@2487.86,765.09 ccw(c2472.82,780.13) 2494.09,780.13 ; v1@2487.86,765.09 ccw(c2472.82,780.13) 2494.09,780.13 ; v1@2487.86,765.09 ccw(c2472.82,780.13) 2494.09,780.13 ; v1@2487.86,1777.94 cw(c2472.82,1762.9) 2494.09,1762.9 ; v1@2487.86,1777.94 cw(c2472.82,1762.9) 2494.09,1762.9 ; v1@2487.86,1777.94 cw(c2472.82,1762.9) 2494.09,1762.9 ; 2494.09,780.13 ccw(c2515.37,780.13) v1@2500.32,765.09 ; 2494.09,780.13 ccw(c2515.37,780.13) v1@2500.32,765.09 ; 2494.09,780.13 ccw(c2515.37,780.13) v1@2500.32,765.09 ; 2494.09,1762.9 cw(c2515.37,1762.9) v1@2500.32,1777.94 ; 2494.09,1762.9 cw(c2515.37,1762.9) v1@2500.32,1777.94 ; 2494.09,1762.9 cw(c2515.37,1762.9) v1@2500.32,1777.94 ; P8.15@2901.52,3654.67 cw(c2856.23,3609.38) 2920.28,3609.38 ; P8.15@2901.52,3654.67 cw(c2856.23,3609.38) 2920.28,3609.38 ; P8.15@2901.52,3654.67 cw(c2856.23,3609.38) 2920.28,3609.38 ; P8.15@2905.76,3658.91 cw(c2870.72,3623.87) 2920.28,3623.87 ; P8.15@2905.76,3658.91 cw(c2870.72,3623.87) 2920.28,3623.87 ; P8.15@2905.76,3658.91 cw(c2870.72,3623.87) 2920.28,3623.87 ; P8.15@2910,3663.15 cw(c2885.2,3638.35) 2920.28,3638.35 ; P8.15@2910,3663.15 cw(c2885.2,3638.35) 2920.28,3638.35 ; P8.15@2910,3663.15 cw(c2885.2,3638.35) 2920.28,3638.35 ; v1@2914.05,1969.81 ccw(c2899,1984.85) 2920.28,1984.85 ; v1@2914.05,1969.81 ccw(c2899,1984.85) 2920.28,1984.85 ; v1@2914.05,1969.81 ccw(c2899,1984.85) 2920.28,1984.85 ; 2920.28,1984.85 ccw(c2941.55,1984.85) v1@2926.51,1969.81 ; 2920.28,1984.85 ccw(c2941.55,1984.85) v1@2926.51,1969.81 ; 2920.28,1984.85 ccw(c2941.55,1984.85) v1@2926.51,1969.81 ; 2920.28,3609.38 cw(c2984.32,3609.38) P8.15@2939.03,3654.67 ; 2920.28,3609.38 cw(c2984.32,3609.38) P8.15@2939.03,3654.67 ; 2920.28,3609.38 cw(c2984.32,3609.38) P8.15@2939.03,3654.67 ; 2920.28,3623.87 cw(c2969.83,3623.87) P8.15@2934.79,3658.91 ; 2920.28,3623.87 cw(c2969.83,3623.87) P8.15@2934.79,3658.91 ; 2920.28,3623.87 cw(c2969.83,3623.87) P8.15@2934.79,3658.91 ; 2920.28,3638.35 cw(c2955.35,3638.35) P8.15@2930.55,3663.15 ; 2920.28,3638.35 cw(c2955.35,3638.35) P8.15@2930.55,3663.15 ; 2920.28,3638.35 cw(c2955.35,3638.35) P8.15@2930.55,3663.15
PA0: P6.50 U5.23 | length 3649.5
  Top Layer w6: U5.23@2718.38,1757.91 2665.35,1704.88 2665.35,1648.01 2731.68,1581.69 2867.13,1581.69 2894.68,1554.13 2894.68,1315.94 2948.82,1261.81 3472.44,1261.81 3671.26,1062.99 3792.32,1062.99 P6.50@3841.04,1014.27 ; 2692.54,1732.07 cw(c2697.5,1727.11) U5.23@2697.5,1734.12 ; 2692.54,1732.07 ccw(c2687.58,1737.03) U5.23@2694.6,1737.03 ; 2692.54,1732.07 ccw(c2687.58,1737.03) U5.23@2694.6,1737.03 ; 2692.54,1732.07 cw(c2697.5,1727.11) U5.23@2697.5,1734.12 ; 2692.54,1732.07 ccw(c2687.58,1737.03) U5.23@2694.6,1737.03 ; 2692.54,1732.07 cw(c2697.5,1727.11) U5.23@2697.5,1734.12 ; 3793.62,1061.7 cw(c3745.31,1013.39) P6.50@3813.63,1013.39 ; 3793.62,1061.7 cw(c3745.31,1013.39) P6.50@3813.63,1013.39 ; 3793.62,1061.7 cw(c3745.31,1013.39) P6.50@3813.63,1013.39 ; 3797.9,1057.42 ccw(c3840.16,1099.68) P6.50@3840.16,1039.91 ; 3797.9,1057.42 ccw(c3840.16,1099.68) P6.50@3840.16,1039.91 ; 3797.9,1057.42 ccw(c3840.16,1099.68) P6.50@3840.16,1039.91 ; 3803.86,1051.45 cw(c3765.8,1013.39) P6.50@3819.63,1013.39 ; 3803.86,1051.45 cw(c3765.8,1013.39) P6.50@3819.63,1013.39 ; 3803.86,1051.45 cw(c3765.8,1013.39) P6.50@3819.63,1013.39 ; 3805.89,1042.29 ccw(c3849.44,1053.96) P6.50@3839.38,1010 ; 3805.89,1042.29 ccw(c3849.44,1053.96) P6.50@3839.38,1010 ; 3805.89,1042.29 ccw(c3849.44,1053.96) P6.50@3839.38,1010 ; 3808.14,1047.18 ccw(c3840.16,1079.19) P6.50@3840.16,1033.91 ; 3808.14,1047.18 ccw(c3840.16,1079.19) P6.50@3840.16,1033.91 ; 3808.14,1047.18 ccw(c3840.16,1079.19) P6.50@3840.16,1033.91 ; 3808.46,1032.66 ccw(c3846.93,1042.97) P6.50@3838.04,1004.15 ; 3808.46,1032.66 ccw(c3846.93,1042.97) P6.50@3838.04,1004.15 ; 3808.46,1032.66 ccw(c3846.93,1042.97) P6.50@3838.04,1004.15 ; 3811.04,1023.04 ccw(c3844.41,1031.98) P6.50@3836.71,998.3 ; 3811.04,1023.04 ccw(c3844.41,1031.98) P6.50@3836.71,998.3 ; 3811.04,1023.04 ccw(c3844.41,1031.98) P6.50@3836.71,998.3 ; 3812.58,1039.71 ccw(c3843.84,1048.08) P6.50@3840.42,1015.9 ; 3812.58,1039.71 ccw(c3843.84,1048.08) P6.50@3840.42,1015.9 ; 3812.58,1039.71 ccw(c3843.84,1048.08) P6.50@3840.42,1015.9 ; 3813.07,1047.17 cw(c3802.19,1006.55) P6.50@3843.58,1014 ; 3813.07,1047.17 cw(c3802.19,1006.55) P6.50@3843.58,1014 ; 3813.07,1047.17 cw(c3802.19,1006.55) P6.50@3843.58,1014 ; 3814.1,1041.21 cw(c3786.28,1013.39) P6.50@3825.63,1013.39 ; 3814.1,1041.21 cw(c3786.28,1013.39) P6.50@3825.63,1013.39 ; 3814.1,1041.21 cw(c3786.28,1013.39) P6.50@3825.63,1013.39 ; 3814.84,1031.27 ccw(c3842.85,1038.77) P6.50@3839.79,1009.93 ; 3814.84,1031.27 ccw(c3842.85,1038.77) P6.50@3839.79,1009.93 ; 3814.84,1031.27 ccw(c3842.85,1038.77) P6.50@3839.79,1009.93 ; 3815.9,1040.41 cw(c3808.3,1012.06) P6.50@3837.63,1013.28 ; 3815.9,1040.41 cw(c3808.3,1012.06) P6.50@3837.63,1013.28 ; 3815.9,1040.41 cw(c3808.3,1012.06) P6.50@3837.63,1013.28 ; 3818.38,1036.93 ccw(c3840.16,1058.71) P6.50@3840.16,1027.91 ; 3818.38,1036.93 ccw(c3840.16,1058.71) P6.50@3840.16,1027.91 ; 3818.38,1036.93 ccw(c3840.16,1058.71) P6.50@3840.16,1027.91 ; 3822.21,1044.72 cw(c3812.47,1008.4) P6.50@3849.48,1015.06 ; 3822.21,1044.72 cw(c3812.47,1008.4) P6.50@3849.48,1015.06 ; 3822.21,1044.72 cw(c3812.47,1008.4) P6.50@3849.48,1015.06 ; 3823.79,1038.3 cw(c3816.85,1012.41) P6.50@3843.63,1013.53 ; 3823.79,1038.3 cw(c3816.85,1012.41) P6.50@3843.63,1013.53 ; 3823.79,1038.3 cw(c3816.85,1012.41) P6.50@3843.63,1013.53 ; 3831.34,1042.28 cw(c3822.76,1010.25) P6.50@3855.39,1016.13 ; 3831.34,1042.28 cw(c3822.76,1010.25) P6.50@3855.39,1016.13 ; 3831.34,1042.28 cw(c3822.76,1010.25) P6.50@3855.39,1016.13
PA1: P6.47 U5.24 | length 1947.9
  Top Layer w6: U5.24@2732.3,1743.99 2684.06,1695.74 2684.06,1646.28 2736.65,1593.69 2872.1,1593.69 2906.68,1559.1 2906.68,1320.92 2953.79,1273.81 3527.57,1273.81 3687.99,1113.39 ; P6.47@3740.16,1113.39 3687.99,1113.39 ; 2706.46,1718.15 cw(c2711.42,1713.19) U5.24@2711.42,1720.2 ; 2706.46,1718.15 ccw(c2701.5,1723.11) U5.24@2708.52,1723.11 ; 2706.46,1718.15 ccw(c2701.5,1723.11) U5.24@2708.52,1723.11 ; 2706.46,1718.15 cw(c2711.42,1713.19) U5.24@2711.42,1720.2 ; 2706.46,1718.15 ccw(c2701.5,1723.11) U5.24@2708.52,1723.11 ; 2706.46,1718.15 cw(c2711.42,1713.19) U5.24@2711.42,1720.2 ; 3687.99,1113.39 cw(c3687.99,1075.36) P6.47@3718.72,1097.76 ; 3687.99,1113.39 ccw(c3687.99,1151.41) P6.47@3718.72,1129.01 ; 3687.99,1113.39 ccw(c3687.99,1151.41) P6.47@3718.72,1129.01 ; 3687.99,1113.39 cw(c3687.99,1075.36) P6.47@3718.72,1097.76 ; 3687.99,1113.39 ccw(c3687.99,1151.41) P6.47@3718.72,1129.01 ; 3687.99,1113.39 cw(c3687.99,1075.36) P6.47@3718.72,1097.76 ; 3699.79,1113.39 cw(c3699.79,1083.96) P6.47@3723.57,1101.29 ; 3699.79,1113.39 ccw(c3699.79,1142.81) P6.47@3723.57,1125.48 ; 3699.79,1113.39 ccw(c3699.79,1142.81) P6.47@3723.57,1125.48 ; 3699.79,1113.39 cw(c3699.79,1083.96) P6.47@3723.57,1101.29 ; 3699.79,1113.39 ccw(c3699.79,1142.81) P6.47@3723.57,1125.48 ; 3699.79,1113.39 cw(c3699.79,1083.96) P6.47@3723.57,1101.29
PA2: P1.10 P6.48 U5.25 | length 8924.5
  Top Layer w6: P1.10@822.83,3009.45 822.83,3444.88 916.53,3538.57 v1(2726.19,3538.57) ; v1(2773.62,1816.93) 2773.62,1757.47 U5.25@2746.22,1730.07 2703.74,1687.59 2703.74,1643.57 2741.62,1605.69 2877.07,1605.69 2918.68,1564.07 2918.68,1325.89 2958.76,1285.81 3558.68,1285.81 3681.1,1163.39 3792.32,1163.39 P6.48@3841.24,1114.47 ; P1.10@804.08,3028.21 ccw(c758.79,3073.49) 822.83,3073.49 ; P1.10@804.08,3028.21 ccw(c758.79,3073.49) 822.83,3073.49 ; P1.10@804.08,3028.21 ccw(c758.79,3073.49) 822.83,3073.49 ; P1.10@808.32,3023.96 ccw(c773.28,3059.01) 822.83,3059.01 ; P1.10@808.32,3023.96 ccw(c773.28,3059.01) 822.83,3059.01 ; P1.10@808.32,3023.96 ccw(c773.28,3059.01) 822.83,3059.01 ; P1.10@812.56,3019.72 ccw(c787.76,3044.52) 822.83,3044.52 ; P1.10@812.56,3019.72 ccw(c787.76,3044.52) 822.83,3044.52 ; P1.10@812.56,3019.72 ccw(c787.76,3044.52) 822.83,3044.52 ; 822.83,3044.52 ccw(c857.91,3044.52) P1.10@833.11,3019.72 ; 822.83,3044.52 ccw(c857.91,3044.52) P1.10@833.11,3019.72 ; 822.83,3044.52 ccw(c857.91,3044.52) P1.10@833.11,3019.72 ; 822.83,3059.01 ccw(c872.39,3059.01) P1.10@837.35,3023.96 ; 822.83,3059.01 ccw(c872.39,3059.01) P1.10@837.35,3023.96 ; 822.83,3059.01 ccw(c872.39,3059.01) P1.10@837.35,3023.96 ; 822.83,3073.49 ccw(c886.88,3073.49) P1.10@841.59,3028.21 ; 822.83,3073.49 ccw(c886.88,3073.49) P1.10@841.59,3028.21 ; 822.83,3073.49 ccw(c886.88,3073.49) P1.10@841.59,3028.21 ; 2704.92,3538.57 cw(c2704.92,3517.3) v1@2719.96,3532.34 ; 2704.92,3538.57 ccw(c2704.92,3559.85) v1@2719.96,3544.81 ; 2704.92,3538.57 ccw(c2704.92,3559.85) v1@2719.96,3544.81 ; 2704.92,3538.57 cw(c2704.92,3517.3) v1@2719.96,3532.34 ; 2704.92,3538.57 ccw(c2704.92,3559.85) v1@2719.96,3544.81 ; 2704.92,3538.57 cw(c2704.92,3517.3) v1@2719.96,3532.34 ; 2720.38,1704.23 cw(c2725.34,1699.27) U5.25@2725.34,1706.28 ; 2720.38,1704.23 ccw(c2715.42,1709.19) U5.25@2722.44,1709.19 ; 2720.38,1704.23 ccw(c2715.42,1709.19) U5.25@2722.44,1709.19 ; 2720.38,1704.23 cw(c2725.34,1699.27) U5.25@2725.34,1706.28 ; 2720.38,1704.23 ccw(c2715.42,1709.19) U5.25@2722.44,1709.19 ; 2720.38,1704.23 cw(c2725.34,1699.27) U5.25@2725.34,1706.28 ; U5.25@2767.1,1753.85 ccw(c2767.1,1760.87) 2772.06,1755.91 ; U5.25@2767.1,1753.85 ccw(c2767.1,1760.87) 2772.06,1755.91 ; U5.25@2767.1,1753.85 ccw(c2767.1,1760.87) 2772.06,1755.91 ; v1@2767.39,1810.7 cw(c2752.35,1795.66) 2773.62,1795.66 ; v1@2767.39,1810.7 cw(c2752.35,1795.66) 2773.62,1795.66 ; v1@2767.39,1810.7 cw(c2752.35,1795.66) 2773.62,1795.66 ; U5.25@2770,1750.95 cw(c2777.02,1750.95) 2772.06,1755.91 ; U5.25@2770,1750.95 cw(c2777.02,1750.95) 2772.06,1755.91 ; U5.25@2770,1750.95 cw(c2777.02,1750.95) 2772.06,1755.91 ; 2773.62,1795.66 cw(c2794.89,1795.66) v1@2779.85,1810.7 ; 2773.62,1795.66 cw(c2794.89,1795.66) v1@2779.85,1810.7 ; 2773.62,1795.66 cw(c2794.89,1795.66) v1@2779.85,1810.7 ; 3793.34,1162.37 cw(c3744.36,1113.39) P6.48@3813.63,1113.39 ; 3793.34,1162.37 cw(c3744.36,1113.39) P6.48@3813.63,1113.39 ; 3793.34,1162.37 cw(c3744.36,1113.39) P6.48@3813.63,1113.39 ; 3798.57,1157.14 ccw(c3840.16,1198.73) P6.48@3840.16,1139.91 ; 3798.57,1157.14 ccw(c3840.16,1198.73) P6.48@3840.16,1139.91 ; 3798.57,1157.14 ccw(c3840.16,1198.73) P6.48@3840.16,1139.91 ; 3803.58,1152.12 cw(c3764.84,1113.39) P6.48@3819.63,1113.39 ; 3803.58,1152.12 cw(c3764.84,1113.39) P6.48@3819.63,1113.39 ; 3803.58,1152.12 cw(c3764.84,1113.39) P6.48@3819.63,1113.39 ; 3805.83,1142.49 ccw(c3849.73,1154.25) P6.48@3839.37,1110 ; 3805.83,1142.49 ccw(c3849.73,1154.25) P6.48@3839.37,1110 ; 3805.83,1142.49 ccw(c3849.73,1154.25) P6.48@3839.37,1110 ; 3808.43,1132.81 ccw(c3847.13,1143.18) P6.48@3838,1104.16 ; 3808.43,1132.81 ccw(c3847.13,1143.18) P6.48@3838,1104.16 ; 3808.43,1132.81 ccw(c3847.13,1143.18) P6.48@3838,1104.16 ; 3808.81,1146.9 ccw(c3840.16,1178.24) P6.48@3840.16,1133.91 ; 3808.81,1146.9 ccw(c3840.16,1178.24) P6.48@3840.16,1133.91 ; 3808.81,1146.9 ccw(c3840.16,1178.24) P6.48@3840.16,1133.91 ; 3811.02,1123.13 ccw(c3844.54,1132.11) P6.48@3836.63,1098.32 ; 3811.02,1123.13 ccw(c3844.54,1132.11) P6.48@3836.63,1098.32 ; 3811.02,1123.13 ccw(c3844.54,1132.11) P6.48@3836.63,1098.32 ; 3812.52,1139.94 ccw(c3844.11,1148.4) P6.48@3840.44,1115.9 ; 3812.52,1139.94 ccw(c3844.11,1148.4) P6.48@3840.44,1115.9 ; 3812.52,1139.94 ccw(c3844.11,1148.4) P6.48@3840.44,1115.9 ; 3813.27,1147.12 cw(c3802.48,1106.82) P6.48@3843.58,1113.98 ; 3813.27,1147.12 cw(c3802.48,1106.82) P6.48@3843.58,1113.98 ; 3813.27,1147.12 cw(c3802.48,1106.82) P6.48@3843.58,1113.98 ; 3813.83,1141.88 cw(c3785.33,1113.39) P6.48@3825.63,1113.39 ; 3813.83,1141.88 cw(c3785.33,1113.39) P6.48@3825.63,1113.39 ; 3813.83,1141.88 cw(c3785.33,1113.39) P6.48@3825.63,1113.39 ; 3814.79,1131.43 ccw(c3843.05,1139) P6.48@3839.77,1109.94 ; 3814.79,1131.43 ccw(c3843.05,1139) P6.48@3839.77,1109.94 ; 3814.79,1131.43 ccw(c3843.05,1139) P6.48@3839.77,1109.94 ; 3816.13,1140.35 cw(c3808.61,1112.31) P6.48@3837.63,1113.3 ; 3816.13,1140.35 cw(c3808.61,1112.31) P6.48@3837.63,1113.3 ; 3816.13,1140.35 cw(c3808.61,1112.31) P6.48@3837.63,1113.3 ; 3819.05,1136.65 ccw(c3840.16,1157.76) P6.48@3840.16,1127.91 ; 3819.05,1136.65 ccw(c3840.16,1157.76) P6.48@3840.16,1127.91 ; 3819.05,1136.65 ccw(c3840.16,1157.76) P6.48@3840.16,1127.91 ; 3822.35,1144.68 cw(c3812.68,1108.6) P6.48@3849.49,1115.01 ; 3822.35,1144.68 cw(c3812.68,1108.6) P6.48@3849.49,1115.01 ; 3822.35,1144.68 cw(c3812.68,1108.6) P6.48@3849.49,1115.01 ; 3823.95,1138.25 cw(c3817.08,1112.6) P6.48@3843.63,1113.5 ; 3823.95,1138.25 cw(c3817.08,1112.6) P6.48@3843.63,1113.5 ; 3823.95,1138.25 cw(c3817.08,1112.6) P6.48@3843.63,1113.5 ; 3831.43,1142.25 cw(c3822.89,1110.37) P6.48@3855.4,1116.04 ; 3831.43,1142.25 cw(c3822.89,1110.37) P6.48@3855.4,1116.04 ; 3831.43,1142.25 cw(c3822.89,1110.37) P6.48@3855.4,1116.04
  Bottom Layer w6: v1@2728.35,3538.57 2728.35,2243.49 2773.62,2198.21 v1(2773.62,1816.93) ; v1@2719.96,3532.34 cw(c2699.71,3512.09) 2728.35,3512.09 ; v1@2719.96,3532.34 cw(c2699.71,3512.09) 2728.35,3512.09 ; v1@2719.96,3532.34 cw(c2699.71,3512.09) 2728.35,3512.09 ; v1@2724.2,3536.59 cw(c2714.19,3526.58) 2728.35,3526.58 ; v1@2724.2,3536.59 cw(c2714.19,3526.58) 2728.35,3526.58 ; v1@2724.2,3536.59 cw(c2714.19,3526.58) 2728.35,3526.58 ; 2728.35,3522.51 cw(c2742.25,3522.51) v1@2732.42,3532.34 ; 2728.35,3522.51 cw(c2742.25,3522.51) v1@2732.42,3532.34 ; 2728.35,3522.51 cw(c2742.25,3522.51) v1@2732.42,3532.34 ; v1@2767.39,1823.16 ccw(c2752.35,1838.2) 2773.62,1838.2 ; v1@2767.39,1823.16 ccw(c2752.35,1838.2) 2773.62,1838.2 ; v1@2767.39,1823.16 ccw(c2752.35,1838.2) 2773.62,1838.2 ; 2773.62,1838.2 ccw(c2794.89,1838.2) v1@2779.85,1823.16 ; 2773.62,1838.2 ccw(c2794.89,1838.2) v1@2779.85,1823.16 ; 2773.62,1838.2 ccw(c2794.89,1838.2) v1@2779.85,1823.16